# EAGLE board schematic_base_board (EAGLE 7.2.0)
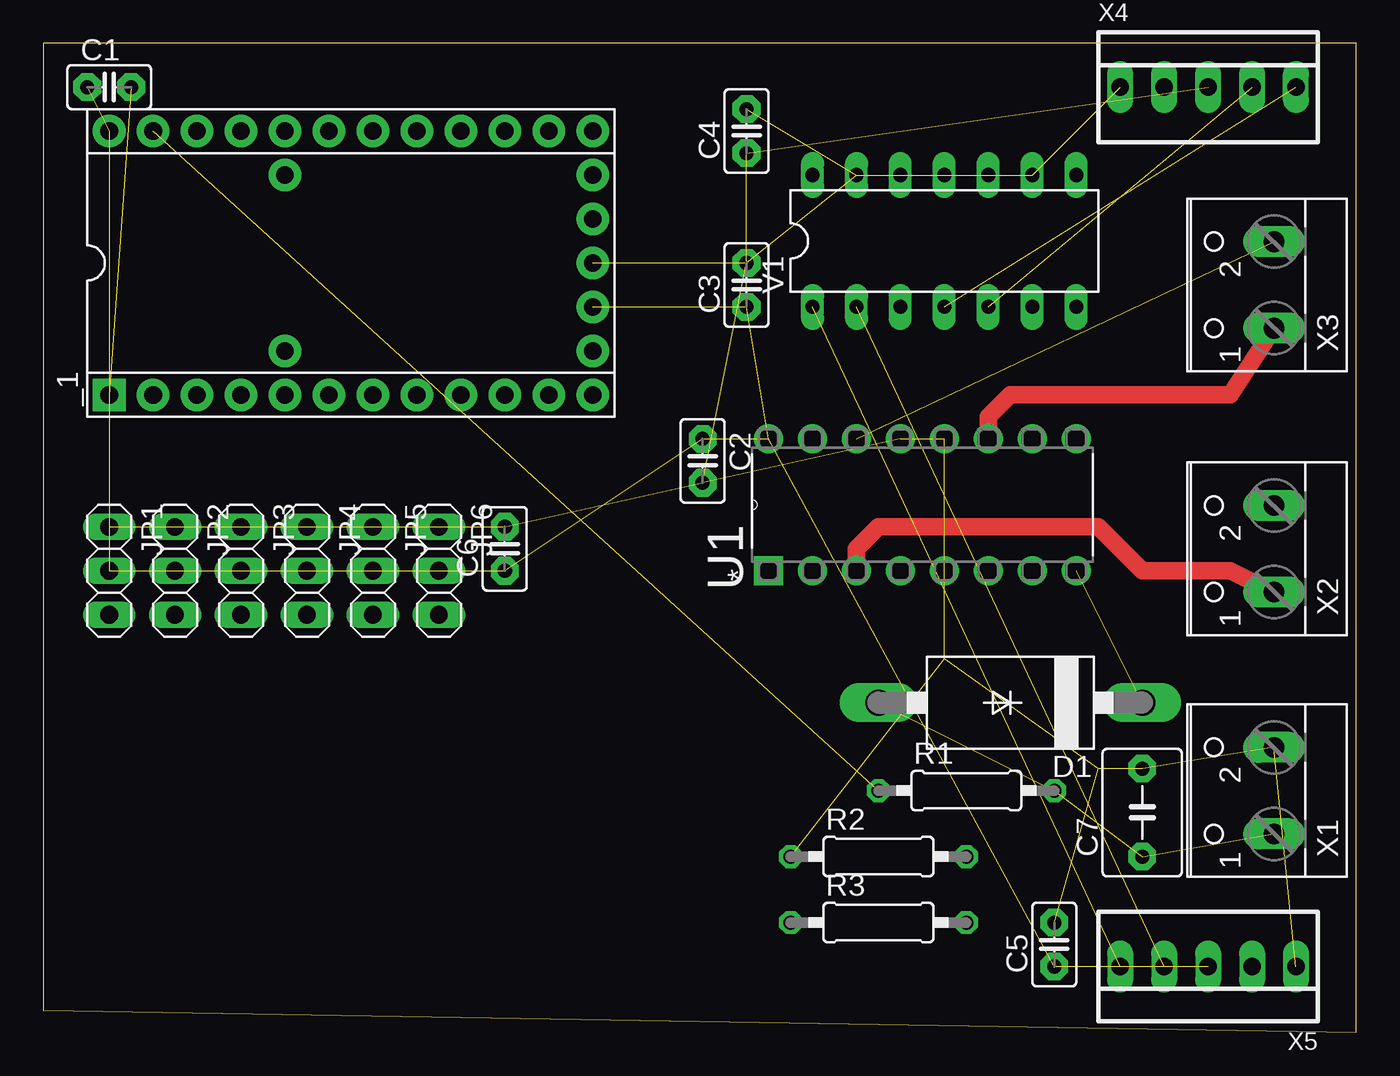
[diagram p0: board, top side]
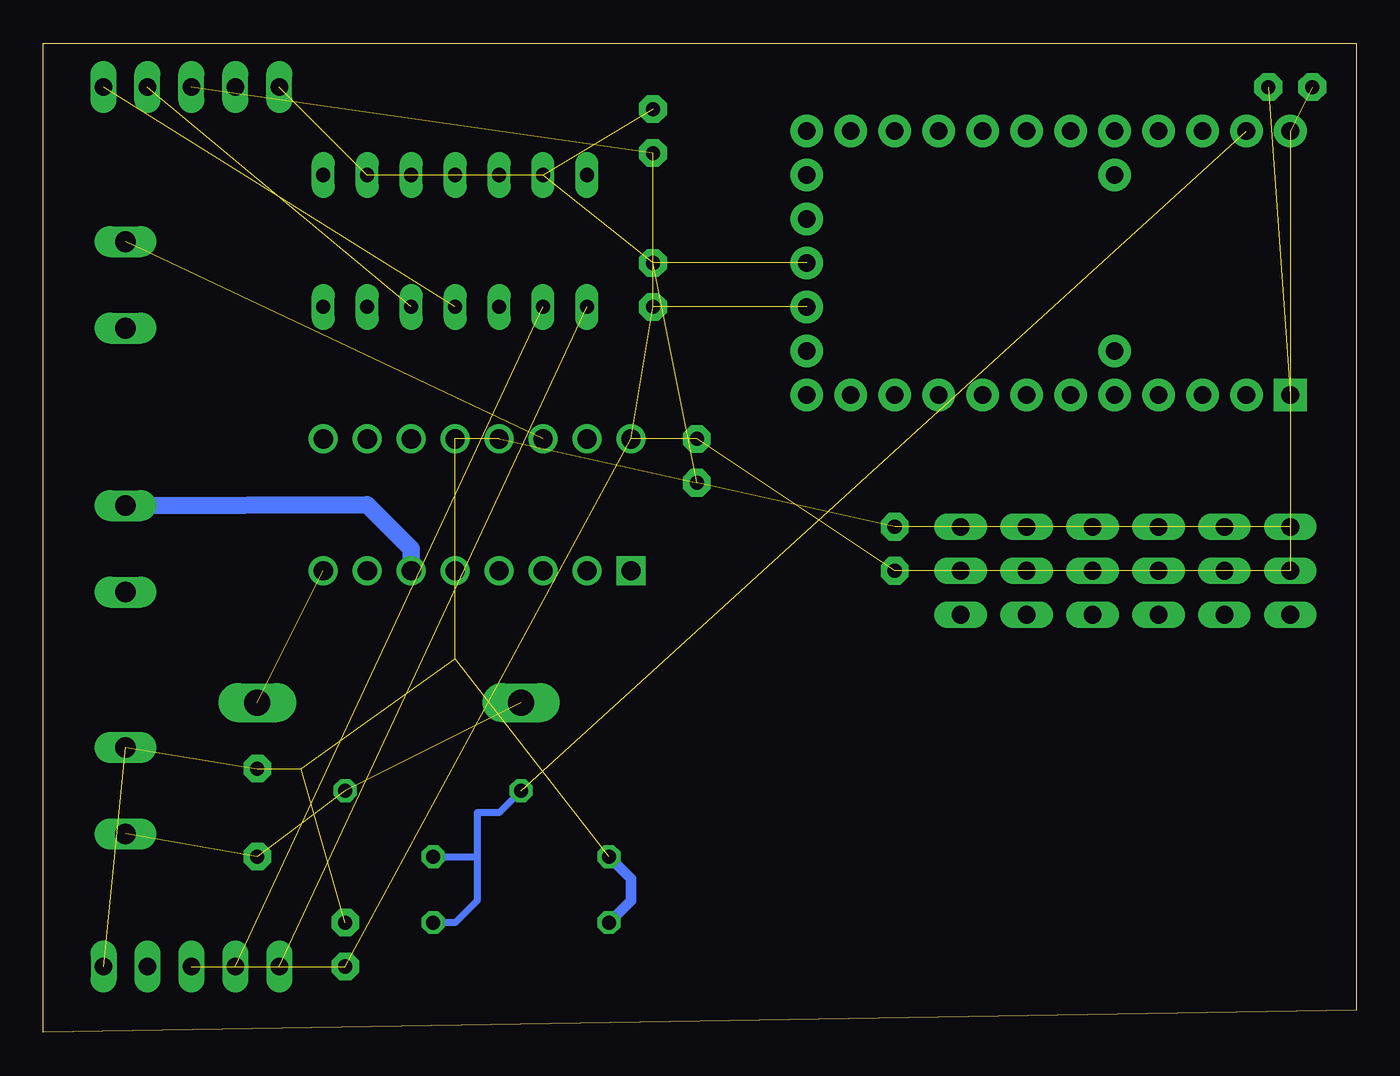
[diagram p1: board, bottom side, seen from below]

Size 75.87 x 57.14 mm. Coordinates in mm from the lower left corner, seen from the top.
Outline: 0,1.27 75.87,0 75.87,57.14 0,57.14 0,1.27
Copper layers (1*16): Top 0.035mm / dielectric 1.5mm / Bottom 0.035mm
Design rules "default": minimum track width 10mil, minimum drill 24mil, track to track 8mil, track to pad 8mil, pad to pad 8mil, via to via 8mil, smd to smd 8mil, copper to edge 40mil, drill to drill 8mil, minimum pad ring 10mil, minimum via ring 8mil, stop-mask expansion 4mil, vias tented up to drill 0mil, thermal gap 10mil

## Footprints (pad centres in the part's own frame; a part is rotated, then mirrored left to right if it is on the bottom)
TEENSY = drill 1.016 pad 1.88: 5V2 13.97,-2.54; +5V -13.97,7.62; B0 -11.43,-7.62; B1 -8.89,-7.62; B2 -6.35,-7.62; B3 -3.81,-7.62; B4 8.89,7.62; B5 6.35,7.62; B6 3.81,7.62; B7 -1.27,-7.62; C6 11.43,-7.62; C7 13.97,-7.62; D0 1.27,-7.62; D1 3.81,-7.62; D2 6.35,-7.62; D3 8.89,-7.62; D4 13.97,5.08; D5 13.97,-5.08; D6 13.97,7.62; D7 11.43,7.62; E6 -3.81,-5.08; F0 -11.43,7.62; F1 -8.89,7.62; F4 -6.35,7.62; F5 -3.81,7.62; F6 -1.27,7.62; F7 1.27,7.62; GRND1 13.97,0; REF -3.81,5.08; RST 13.97,2.54 | drill 1.016 pad 1.88 square: GND -13.97,-7.62
C2.5-2 = drill 0.813 pad 1.6 octagon: 1 -1.27,0; 2 1.27,0
C5B4.5 = drill 0.813 pad 1.6 octagon: 1 -2.54,0; 2 2.54,0
C2673 = drill 1.499 long: A 7.62,0; C -7.62,0
1X03 = drill 1.016 long: 1 -2.54,0; 2 0,0; 3 2.54,0
0207/10 = drill 0.813 octagon: 1 -5.08,0; 2 5.08,0
DIP254P762X508-16 = drill 1.118 square: 1 -7.62,17.78 | drill 1.118: 2 -7.62,15.24; 3 -7.62,12.7; 4 -7.62,10.16; 5 -7.62,7.62; 6 -7.62,5.08; 7 -7.62,2.54; 8 -7.62,0; 9 0,0; 10 0,2.54; 11 0,5.08; 12 0,7.62; 13 0,10.16; 14 0,12.7; 15 0,15.24; 16 0,17.78
DIL14 = drill 0.813 long: 1 -7.62,-3.81; 2 -5.08,-3.81; 3 -2.54,-3.81; 4 0,-3.81; 5 2.54,-3.81; 6 5.08,-3.81; 7 7.62,-3.81; 8 7.62,3.81; 9 5.08,3.81; 10 2.54,3.81; 11 0,3.81; 12 -2.54,3.81; 13 -5.08,3.81; 14 -7.62,3.81
W237-102 = drill 1.194 long: 1 -2.5,-1.27; 2 2.5,-1.27
22-23-2051 = drill 1 long: 1 -5.08,0; 2 -2.54,0; 3 0,0; 4 2.54,0; 5 5.08,0

## Placement (x,y rotation side)
_1  TEENSY  [TEENSY]  17.78,44.45 0 top
C1  [C2.5-2]  3.81,54.61 0 top
C2  [C2.5-2]  38.1,33.02 270 top
C3  [C2.5-2]  40.64,43.18 90 top
C4  [C2.5-2]  40.64,52.07 90 top
C5  [C2.5-2]  58.42,5.08 90 top
C6  [C2.5-2]  26.67,27.94 90 top
C7  [C5B4.5]  63.5,12.7 90 top
D1  [C2673]  55.88,19.05 180 top
JP1  [1X03]  3.81,26.67 270 top
JP2  [1X03]  7.62,26.67 270 top
JP3  [1X03]  11.43,26.67 270 top
JP4  [1X03]  15.24,26.67 270 top
JP5  [1X03]  19.05,26.67 270 top
JP6  [1X03]  22.86,26.67 270 top
R1  [0207/10]  53.34,13.97 0 top
R2  [0207/10]  48.26,10.16 0 top
R3  [0207/10]  48.26,6.35 0 top
U1  SN754410NE  [DIP254P762X508-16]  59.69,34.29 90 top
V1  7486N  [DIL14]  52.07,45.72 0 top
X1  [W237-102]  69.85,13.97 90 top
X2  [W237-102]  69.85,27.94 90 top
X3  [W237-102]  69.85,43.18 90 top
X4  22-23-2051  [22-23-2051]  67.31,54.61 0 top
X5  22-23-2051  [22-23-2051]  67.31,3.81 180 top

## Library data of the parts
_1 = teensy
C1-C7 = capacitor-wima
D1 = diode
JP1-JP6 = pinhead
R1-R3 = eagle-ltspice; SPICEMODEL: NONE; SPICEPREFIX: R
U1 = Texas Instruments_By_element14_Batch_1; MPN: SN754410NE; OC_FARNELL: 1470411; OC_NEWARK: 08F8145; PACKAGE: PDIP-16; SUPPLIER: Texas Instruments
V1 = 74ttl-din
X1-X3 = con-wago-500; MPN: 237-102; OC_FARNELL: unknown; OC_NEWARK: 70K9898
X4 X5 = con-molex; MF: MOLEX; MPN: 22-23-2051; OC_FARNELL: 1462952; OC_NEWARK: 38C9178

## Nets
+UB: V1.14
-UB: V1.7
ADC_VMOTOR: _1.F0 R1.1 R2.2 R3.2
CHA_ENC_L: V1.1 X5.5
CHA_ENC_R: V1.4 X4.5
CHB_ENC_L: V1.2 X5.4
CHB_ENC_R: V1.5 X4.4
GND: _1.GND _1.GRND1 C1.2 C2.2 C3.2 C4.2 C5.2 C6.2 C7.2 JP1.1 JP2.1 JP3.1 JP4.1 JP5.1 JP6.1 R2.1 R3.1 U1.5 U1.12 U1.13 V1.9 V1.10 V1.12 V1.13 X1.2 X4.1 X5.1
INT_ENC_LEFT: V1.3
INT_ENC_RIGHT: V1.6
N$1: X4.2
N$2: D1.C U1.8
N$3: U1.1
N$4: _1.D0
N$5: _1.D1
N$6: _1.D2
N$7: _1.D3
N$8: _1.D4
N$9: _1.D5
N$10: _1.D6
N$11: _1.D7
N$12: _1.C6
N$13: _1.C7
N$14: _1.RST
N$15: X5.2
N$16: _1.F7
N$17: _1.F6
N$18: _1.F5
N$19: _1.F4
N$20: _1.F1
N$22: _1.REF
N$23: _1.E6
N$24: _1.B0
N$25: _1.B1
N$26: _1.B2
N$27: _1.B3
N$28: _1.B4
N$29: _1.B5
N$30: _1.B6
N$31: U1.9
N$32: U1.2
N$33: U1.7
N$34: U1.10
N$35: U1.15
N$36: U1.3 X2.1
N$37: U1.6 X2.2
N$38: U1.11 X3.1
N$39: U1.14 X3.2
PB7: _1.B7
VCC: _1.5V2 _1.+5V C1.1 C2.1 C3.1 C4.1 C5.1 C6.1 JP1.2 JP2.2 JP3.2 JP4.2 JP5.2 JP6.2 U1.16 X4.3 X5.3
VMOTOR: C7.1 D1.A R1.2 X1.1

## Tracks (layer width: path | path; a pad name or v marks a point on that pad's centre or on a via)
ADC_VMOTOR  (1 unrouted)
  Bottom 0.406: R1.1 49.53,12.7 50.8,12.7 50.8,10.16 | 50.8,10.16 50.8,7.62 52.07,6.35 R3.2 | R2.2 50.8,10.16
CHA_ENC_L  (1 unrouted)
CHA_ENC_R  (1 unrouted)
CHB_ENC_L  (1 unrouted)
CHB_ENC_R  (1 unrouted)
GND  (27 unrouted)
  Bottom 0.61: R3.1 41.91,7.62 41.91,8.89 R2.1
N$2  (1 unrouted)
N$36
  Top 1.016: X2.1 68.58,26.67 63.5,26.67 60.96,29.21 48.26,29.21 46.99,27.94 U1.3
N$37
  Bottom 1.016: U1.6 54.61,27.94 57.15,30.48 X2.2
N$38
  Top 1.016: U1.11 54.61,35.56 55.88,36.83 68.58,36.83 X3.1
N$39  (1 unrouted)
VCC  (16 unrouted)
VMOTOR  (3 unrouted)